# EAGLE board 40106-4069-Synth (EAGLE 7.2.0)
Twin-T Analog Drum Voice using CD40106
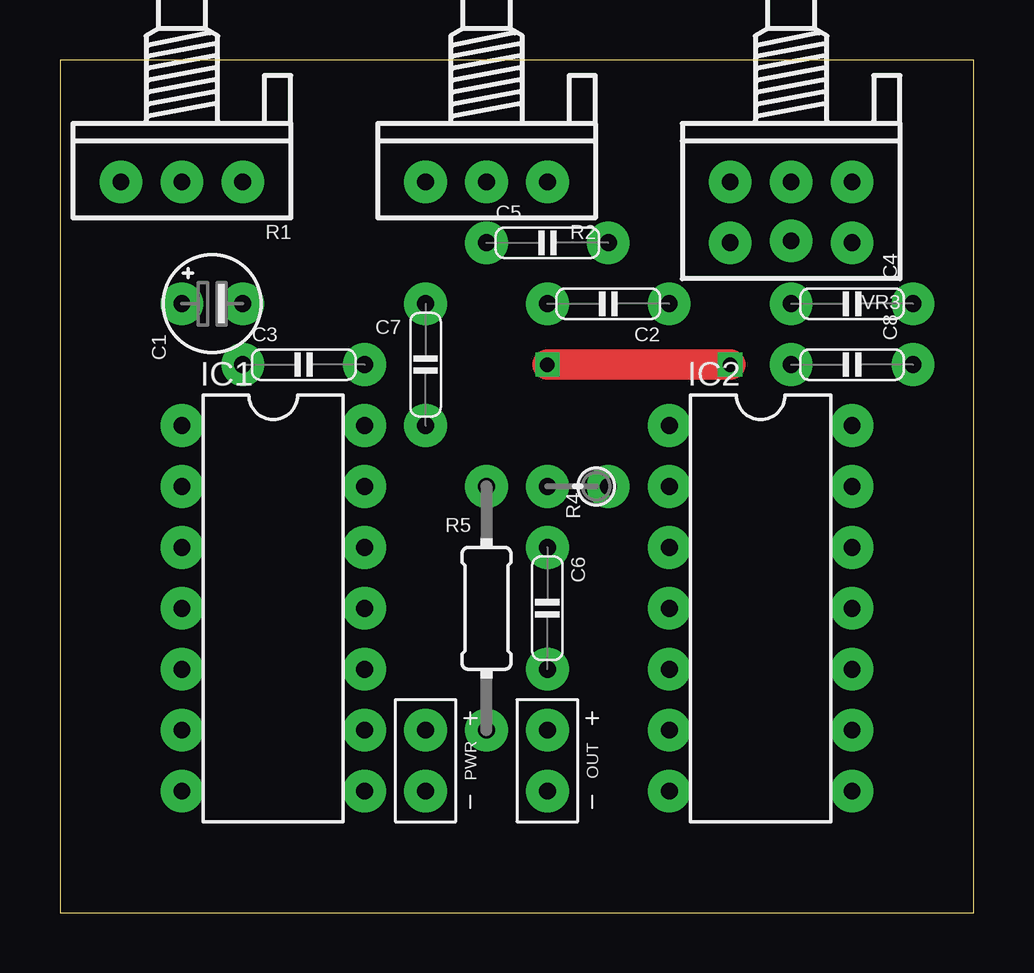
[diagram p0: board, top side]
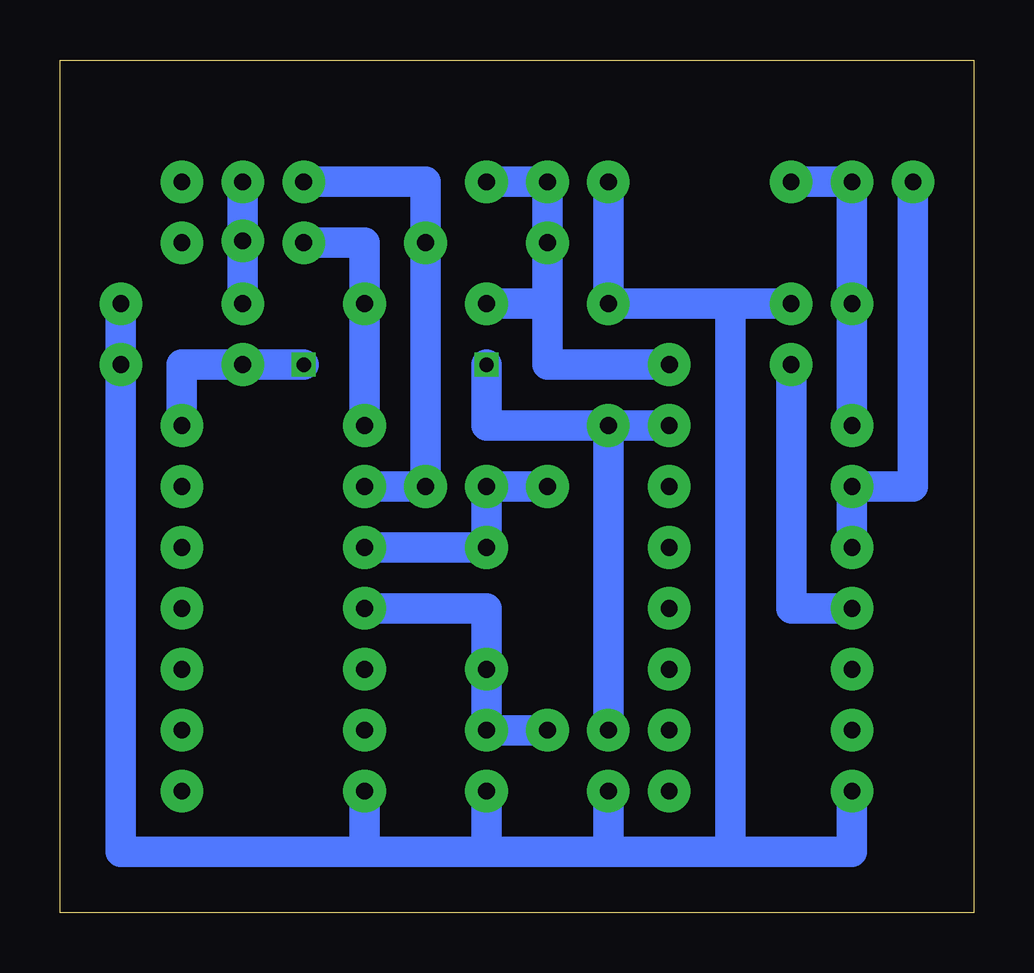
[diagram p1: board, bottom side, seen from below]

Size 38.1 x 35.56 mm. Coordinates in mm from the lower left corner, seen from the top.
Outline: 0,0 38.1,0 38.1,35.56 0,35.56 0,0
Copper layers (1*16): Top 0.035mm / dielectric 1.5mm / Bottom 0.035mm
Design rules "default": minimum track width 10mil, minimum drill 24mil, track to track 8mil, track to pad 8mil, pad to pad 8mil, via to via 8mil, smd to smd 8mil, copper to edge 40mil, drill to drill 8mil, minimum pad ring 10mil, minimum via ring 8mil, stop-mask expansion 4mil, vias tented up to drill 0mil, thermal gap 10mil
Net classes: 0 default: width 0.61 mm

## Footprints (pad centres in the part's own frame; a part is rotated, then mirrored left to right if it is on the bottom)
E2.5-4/V = drill 0.7 pad 1.778: + 0,1.27; - 0,-1.27
C050-020X044 = drill 0.7 pad 1.778: 1 -2.54,0; 2 2.54,0
C050-020X044/V = drill 0.7 pad 1.778: 1 0,2.54; 2 0,-2.54
DIL14 = drill 0.7 pad 1.778: 1 -3.81,7.62; 2 -3.81,5.08; 3 -3.81,2.54; 4 -3.81,0; 5 -3.81,-2.54; 6 -3.81,-5.08; 7 -3.81,-7.62; 8 3.81,-7.62; 9 3.81,-5.08; 10 3.81,-2.54; 11 3.81,0; 12 3.81,2.54; 13 3.81,5.08; 14 3.81,7.62
SPAD+- = drill 0.7 pad 1.778: 1 0,-1.27; 2 0,1.27
POT = drill 0.7 pad 1.778: A -2.54,0; E 2.54,0; S 0,0
0202/2V = drill 0.7 pad 1.778: 1 0,-1.27; 2 0,1.27
0204/10-V = drill 0.7 pad 1.778: 1 0,5.08; 2 0,-5.08
POT-STEREO-2X3 = drill 0.7 pad 1.778: 1-A -2.54,-2.54; 1-E 2.54,-2.54; 1-S 0,-2.54; 2-A -2.54,0; 2-E 2.54,0; 2-S 0,-0.08

## Placement (x,y rotation side)
C1  1μF  [E2.5-4/V]  6.35,25.4 90 top
C2  100nF  [C050-020X044]  22.86,25.4 180 top
C3  100nF  [C050-020X044]  10.16,22.86 0 top
C4  220nF  [C050-020X044/V]  33.02,25.4 270 top
C5  100nF  [C050-020X044]  20.32,27.94 0 top
C6  10nF  [C050-020X044]  20.32,12.7 270 top
C7  100nF  [C050-020X044/V]  15.24,22.86 0 top
C8  100nF  [C050-020X044/V]  33.02,22.86 270 top
IC1  40106N  [DIL14]  8.89,12.7 0 top
IC2  4069N  [DIL14]  29.21,12.7 0 top
OUT  SPAD+--+  [SPAD+-]  20.32,6.35 0 top
PWR  VCC_GNDR  [SPAD+-]  15.24,6.35 0 top
R1  100kΩ  [POT]  5.08,30.48 180 top
R2  100kΩ  [POT]  17.78,30.48 180 top
R4  [0202/2V]  21.59,17.78 90 top
R5  [0204/10-V]  17.78,12.7 0 top
VR3  100kΩ  [POT-STEREO-2X3]  30.48,27.94 180 top

## Library data of the parts
C1-C8 = c
IC1 IC2 = ic
OUT PWR = pad
R1 R2 R4 R5 VR3 = r

## Nets
GND: C1.- C4.1 C7.1 C8.1 IC1.7 IC2.7 OUT.1 PWR.1 R2.E
N$1: C3.1 IC1.4
N$2: C1.+ IC1.1 R1.A R1.S
N$3: IC1.2 IC1.3 R1.E
N$4: C2.2 C3.2 C5.1 R2.A R2.S
N$5: C5.2 IC2.2 R4.1 VR3.1-E
N$6: C2.1 IC2.1 VR3.2-E
N$7: C6.1 IC2.3 R4.2 R5.1
N$9: C6.2 IC2.4 OUT.2 R5.2
N$11: C4.2 VR3.1-S VR3.2-S
VCC: C7.2 C8.2 IC1.14 IC2.14 PWR.2

## Tracks (layer width: path | path; a pad name or v marks a point on that pad's centre or on a via)
GND
  Bottom 1.27: IC2.7 25.4,2.54 | 15.24,2.54 10.16,2.54 | 10.16,2.54 5.08,2.54 IC1.7 | PWR.1 15.24,2.54 | 15.24,2.54 20.32,2.54 | 20.32,2.54 OUT.1 | 25.4,2.54 35.56,2.54 C8.1 C4.1 | 10.16,25.4 C1.- | R2.E C7.1 10.16,25.4 | 10.16,25.4 10.16,2.54 | 20.32,2.54 25.4,2.54
N$1
  Bottom 1.27: IC1.4 7.62,12.7 C3.1
N$2
  Bottom 1.27: R1.A R1.S C1.+ | C1.+ 5.08,22.86 | C1.+ IC1.1
N$3
  Bottom 1.27: IC1.3 IC1.2 2.54,17.78 R1.E
N$4
  Bottom 1.27: C5.1 17.78,25.4 C2.2 | C5.1 17.78,22.86 C3.2 | R2.A R2.S C5.1
N$5
  Bottom 1.27: IC2.2 R4.1 | VR3.1-E 22.86,30.48 R4.1 | C5.2 R4.1
N$6
  Bottom 1.27: VR3.2-E 25.4,27.94 C2.1 IC2.1
N$7
  Bottom 1.27: IC2.3 C6.1 R4.2 R5.1
N$9
  Bottom 1.27: IC2.4 20.32,12.7 C6.2 OUT.2 R5.2
N$11
  Bottom 1.27: C4.2 30.48,27.94 VR3.1-S
VCC  (via drill 0.6)
  Top 1.27: v27.94,22.86 v20.32,22.86
  Bottom 1.27: IC2.14 33.02,22.86 C8.2 v27.94,22.86 | PWR.2 C7.2 | C7.2 20.32,20.32 v20.32,22.86 | C7.2 IC1.14